# Altium PCB ECU.PcbDoc
Units mil, origin at the board's own origin, x right, y up, seen from the top; angles counter-clockwise.
Board outline 7000 x 5000 mil, 2 copper layers (Top Layer, Bottom Layer); 79 components, 78 nets, 296 pads, 2 vias.
Unrouted connection lines stored in the file: 142.
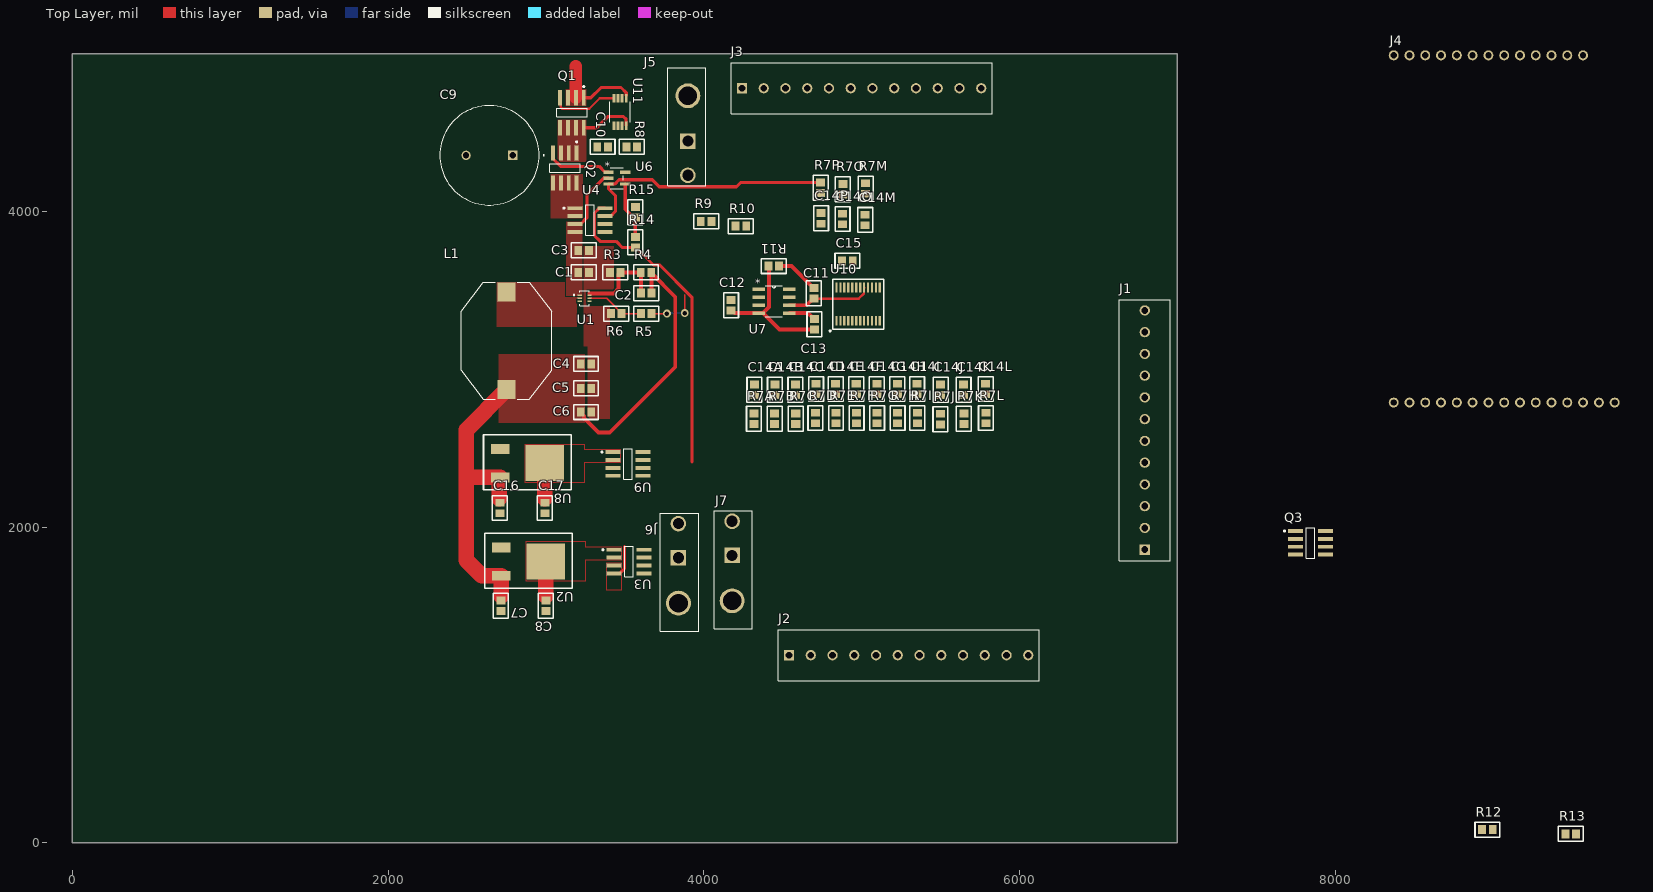
[diagram p0: Top Layer view]
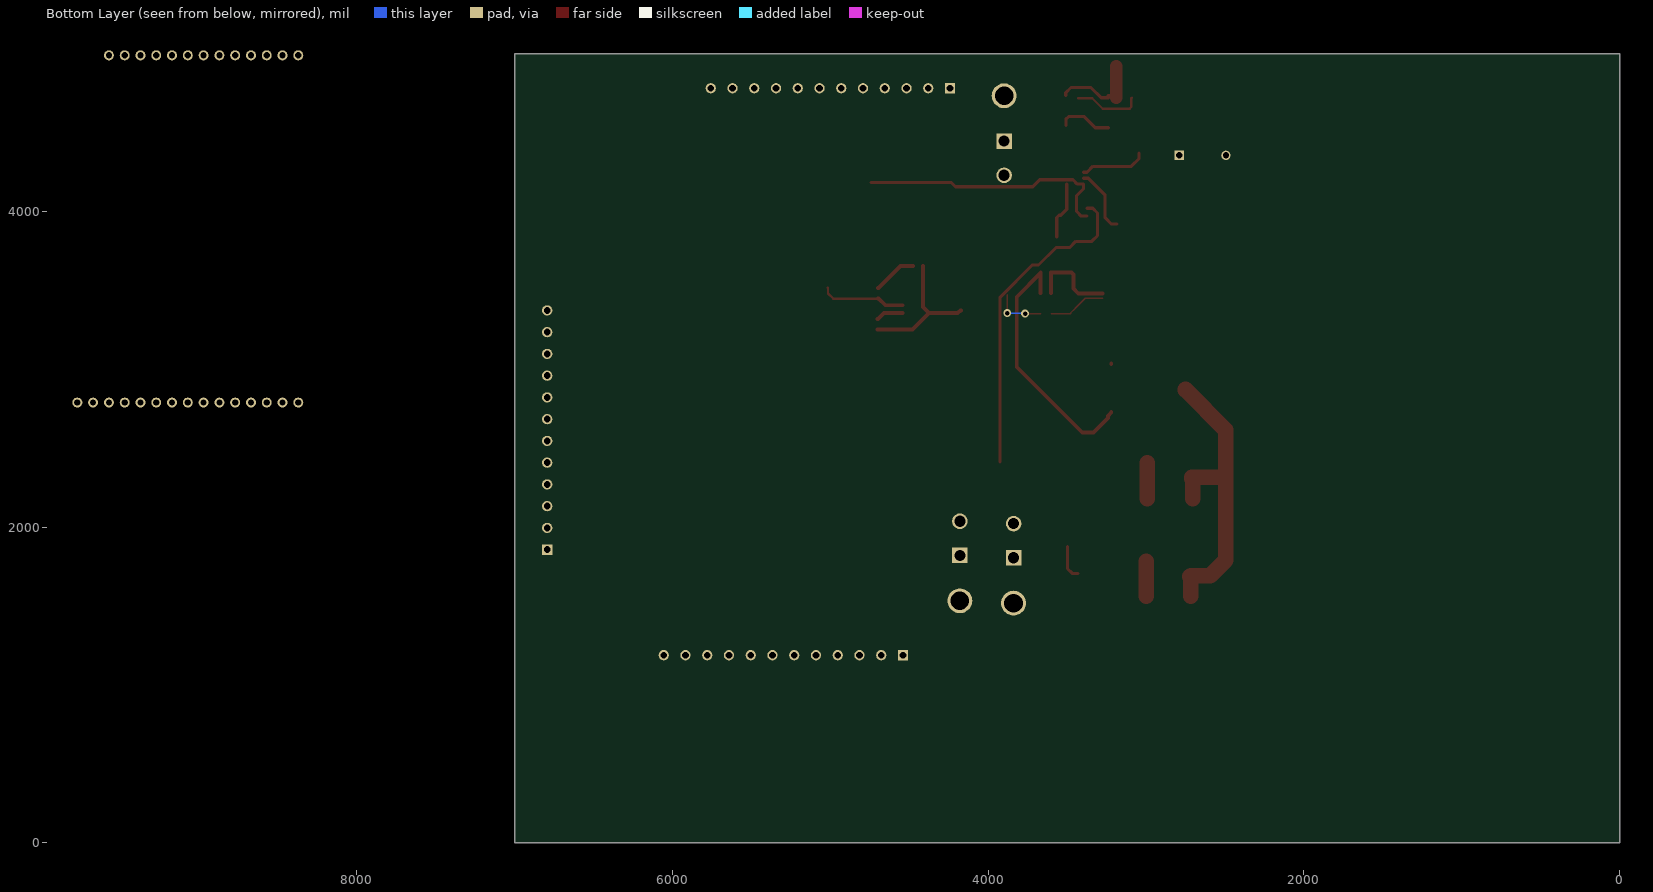
[diagram p1: Bottom Layer view, seen from below]

## Layer stack, top to bottom
Top Solder: solder mask 0.4, Solder Resist, Dk 3.5
Top Layer: signal copper 1.4
Dielectric 1: dielectric 12.6, FR-4, Dk 4.8
Bottom Layer: signal copper 1.4
Bottom Solder: solder mask 0.4, Solder Resist, Dk 3.5

## Board outline
0,0 7000,0 7000,5000 0,5000

## Design rules (kind name [scope] priority, off if disabled: settings)
BoardOutlineClearance BoardOutlineClearance_JLC [All] p1: gap=7.87 ignorepadtopadclearanceinfootprint=FALSE
Clearance Clearance_JLC [All] p1: gap=10 ignorepadtopadclearanceinfootprint=FALSE except(0: SMDPad-Hole Fill-Hole Poly-Hole Region-Hole Text-Hole; 5: Arc-Arc Arc-Track Track-Track SMDPad-SMDPad Fill-Fill Fill-Poly Fill-Region Poly-Region Region-Region; 5.91: SMDPad-Text THPad-Text Via-Text; 7.87: Arc-SMDPad Track-SMDPad; 12.99: Arc-THPad Track-THPad; 21.26: THPad-THPad THPad-Via THPad-Hole Via-Hole)
Clearance [All] p2: gap=10 ignorepadtopadclearanceinfootprint=FALSE except(0: Arc-Hole Track-Hole SMDPad-Hole THPad-Hole Via-Hole Fill-Hole Poly-Hole Region-Hole Text-Hole)
HoleSize ViaSize_JLC [IsVia] p1: absolutevalues=TRUE maxlimit=248.03 minlimit=11.81 maxpercent=80.000 minpercent=20.000
HoleSize PadSize_JLC [IsPad] p2: absolutevalues=TRUE maxlimit=250 minlimit=27.56 maxpercent=80.000 minpercent=20.000
HoleSize HoleSize_JLC [All] p3: absolutevalues=TRUE maxlimit=248.03 minlimit=9.84 maxpercent=80.000 minpercent=20.000
HoleSize [All] p4: absolutevalues=TRUE maxlimit=100 minlimit=1 maxpercent=80.000 minpercent=20.000
HoleToHoleClearance HoleToHoleClearance_JLC [All] p1: gap=19.68 allowstackedmicrovias=TRUE
HoleToHoleClearance [All] p2: gap=10 allowstackedmicrovias=TRUE
MinimumAnnularRing MinViaDiam_JLC [IsVia] p1: minimumring=9.06
MinimumAnnularRing PTHDiam_JLC [All] p2: minimumring=5.91
MinimumSolderMaskSliver [All] p1: minsoldermaskwidth=7.87
PlaneClearance PlaneClearance_inPolygon [InPolygon] p1: clearance=39.37
PlaneClearance PlaneClearance_JLC [All] p2: clearance=39.37
PlaneClearance [All] p3: clearance=20
PolygonConnect PolygonConnect_Via [All] p1: connectstyle=Direct reliefconductorwidth=15.75 reliefentries=4 polygonreliefangle="90 Angle" airgapwidth=10
PolygonConnect [All] p2: connectstyle=Relief reliefconductorwidth=10 reliefentries=4 polygonreliefangle="90 Angle" airgapwidth=10
RoutingVias RoutingVias_JLC [All] p1: holewidth=28 width=50 viastyle="Through Hole" minholewidth=0.79 minwidth=17.72 maxholewidth=28 maxwidth=50
RoutingVias [All] p2: holewidth=28 width=50 viastyle="Through Hole" minholewidth=28 minwidth=50 maxholewidth=28 maxwidth=50
SilkToSolderMaskClearance PadToSilk_JLC [IsPad] p1: minsilkscreentomaskgap=5.91 clearancetoexposedcopper=TRUE
SolderMaskExpansion SolderMaskExpansion_JLC [All] p1: expansion=1.97 istentingtop=FALSE
SolderMaskExpansion [All] p2: expansion=4 istentingtop=FALSE
Width Width_JLC_GND [InNet('GND')] p1: maxlimit=216.54 minlimit=5 preferedwidth=10 minimp=50.000000 maximp=50.000000 favimp=50.000000
Width Width_JLC_HighPower [InNetClass('HighPower')] p2: maxlimit=216.54 minlimit=39.37 preferedwidth=129.92 minimp=50.000000 maximp=50.000000 favimp=50.000000
Width Width_JLC_LowPower [InNetClass('LowPower')] p3: maxlimit=78.74 minlimit=10 preferedwidth=59.06 minimp=50.000000 maximp=50.000000 favimp=50.000000
Width Width_JLC_Signal [InNetClass('Signal')] p4: maxlimit=39.37 minlimit=5 preferedwidth=10 minimp=50.000000 maximp=50.000000 favimp=50.000000
Width Width_JLC [All] p5: maxlimit=100 minlimit=5 preferedwidth=10 minimp=50.000000 maximp=50.000000 favimp=50.000000
Width [All] p6: maxlimit=10 minlimit=10 preferedwidth=10
25 further rules are at their usual default settings.

## Classes and differential pairs
component class ECU_Power: C1 C2 C3 C4 C5 C6 C7 C8 C9 C10 C16 C17 L1 Q1 Q2 R3 R4 R5 R6 R8 R14 R15 U1 U2 U3 U4 U6 U8 U9 U11
component class ECU_Interface: J1 J2 J3 J4 J5 J6 J7 Q3
component class ECU_ADC: C11 C12 C13 C14A C14B C14C C14D C14E C14F C14G C14H C14I C14J C14K C14L C14M C14O C14P C15 R7A R7B R7C R7D R7E R7F R7G R7H R7I R7J R7K R7L R7M R7O R7P R9 R10 R11 R12 R13 U7 U10

## Components (designator, comment, footprint, x,y, rotation, side; value= is the part's Value field where it differs from the comment)
C1 "10uF 4mO" 0805 3235,3615 r180 top
C2 "33 pF" 0805 3640,3480 r0 top
C3 "100nF 20mO" 0805 3235,3755 r180 top
C4 "22uF 750uO" 0805 3250,3035 r180 top
C5 "22uF 750uO" 0805 3250,2880 r180 top
C6 "100nF 30mO" 0805 3250,2730 r180 top
C7 "10 uF" 0805 2716.83,1506.04 r90 top
C8 "10 uF" 0805 3001.83,1506.04 r90 top
C9 "470uF electrolytic" CAPPRD750W80D1600H2700 2642.36,4355 r180 top
C10 "Cap_0805" 0805 3355,4410 r180 top
C11 "47uF" 0805 4700,3485 r90 top
C12 "10uF" 0805 4175,3410 r90 top
C13 "1uF" 0805 4700,3280 r270 top
C14A "0.1 uF" 0805 4320,2865 r270 top
C14B "0.1 uF" 0805 4450,2865 r270 top
C14C "0.1 uF" 0805 4580,2865 r270 top
C14D "0.1 uF" 0805 4710,2870 r270 top
C14E "0.1 uF" 0805 4835,2870 r270 top
C14F "0.1 uF" 0805 4965,2870 r270 top
C14G "0.1 uF" 0805 5095,2870 r270 top
C14H "0.1 uF" 0805 5225,2870 r270 top
C14I "0.1 uF" 0805 5350,2870 r270 top
C14J "0.1 uF" 0805 5500,2865 r270 top
C14K "0.1 uF" 0805 5645,2865 r270 top
C14L "0.1 uF" 0805 5785,2870 r270 top
C14M "0.1 uF" 0805 5025,3950 r90 top
C14O "0.1 uF" 0805 4881.65,3955.98 r90 top
C14P "0.1 uF" 0805 4745,3960 r90 top
C15 "0.1 uF" 0805 4915,3685 r0 top
C16 "10 uF" 0805 2710,2125 r90 top
C17 "10 uF" 0805 2995,2125 r90 top
J1 "1-284391-2" TE_1-284391-2 6795,2614.49 r90 top
J2 "1-284391-2" TE_1-284391-2 5298.61,1187.84 r0 top
J3 "1-284391-2" TE_1-284391-2 5000.51,4780 r0 top
J4 "TopBoardConnector" TopBoardConnector 9071.9,3888.51 r90 top
J5 "CONN HEADER R/A 2POS" "2 POS MOLEX" 3900,4732.4 r180 top
J6 "CONN HEADER R/A 2POS" "2 POS MOLEX" 3840,1517.6 r0 top
J7 "CONN HEADER R/A 2POS" "2 POS MOLEX" 4180,1532.6 r0 top
L1 "SDR1806-2R2ML" IND_BOURNS_SDR1806 2750,3180 r270 top
Q1 "n-mos" D0008A-IPC_A 3165,4625.02 r270 top
Q2 "P-Mos Rds 5mOhm @ 10V" D0008A-IPC_A 3120,4275 r270 top
Q3 "n-mos" D0008A-IPC_A 7845,1900 r0 top
R3 "30k" 0805 3435,3615 r180 top
R4 "270k" 0805 3630,3615 r180 top
R5 "100k" 0805 3640,3350 r0 top
R6 "11.8k" 0805 3450,3350 r0 top
R7A "330 Ohm" 0805 4320,2690 r90 top
R7B "330 Ohm" 0805 4451.65,2690.98 r90 top
R7C "330 Ohm" 0805 4585,2690 r90 top
R7D "330 Ohm" 0805 4710,2695 r90 top
R7E "330 Ohm" 0805 4840,2695 r90 top
R7F "330 Ohm" 0805 4970,2695 r90 top
R7G "330 Ohm" 0805 5100,2695 r90 top
R7H "330 Ohm" 0805 5230,2695 r90 top
R7I "330 Ohm" 0805 5355,2695 r90 top
R7J "330 Ohm" 0805 5501.65,2687.91 r90 top
R7K "330 Ohm" 0805 5650,2690 r90 top
R7L "330 Ohm" 0805 5790,2695 r90 top
R7M "330 Ohm" 0805 5025,4140 r270 top
R7O "330 Ohm" 0805 4880,4135 r270 top
R7P "330 Ohm" 0805 4740,4145 r270 top
R8 "Res_0805" 0805 3540,4410 r180 top
R9 "1.2k Ohm" 0805 4020,3935 r0 top
R10 "4.7k Ohm" 0805 4240,3905 r0 top
R11 "1 Ohm" 0805 4440,3655 r180 top
R12 "1.24k Ohm" 0805 8970,80.59 r0 top
R13 "1.24k Ohm" 0805 9497.91,53.94 r0 top
R14 "4.7k" 0805 3565,3800 r270 top
R15 "2.2k" 0805 3565,3990 r270 top
U1 "TPS564247DRLR" SOT5x3-6_DRL_TEX 3245,3450 r0 top
U2 "Lin Reg 5V Out" NCP1117IDT50T4G 2826.83,1781.04 r270 top
U3 "TMCS1108A4BQDR" D0008A-IPC_A 3526.83,1781.04 r0 top
U4 "TMCS1108A4BQDR" D0008A-IPC_A 3280,3945 r0 top
U6 "OPAMP" SOT-23-5_MC_MCH-M 3450,4210 r0 top
U7 "REF5050MDREP" D8 4445,3430 r0 top
U8 "Lin Reg 5V Out" NCP1117IDT50T4G 2820,2405 r270 top
U9 "TMCS1108A4BQDR" D0008A-IPC_A 3520,2400 r0 top
U10 "ADC" QSOP24 4985,3405 r90 top
U11 "LTC4357IMS8TRPBF" MSOP-8_MS 3470,4630 r270 top

## Footprints (in the part's own frame and the unit in brackets; to place one, negate y for a bottom-side part, rotate by r counter-clockwise, add the part's x,y. Pads: shape width x height; smd on the part's side, far side on the other; paste and mask are expansions set on the pad)
"2 POS MOLEX" [mm] "1724480002"
  rect 2.5x2.5 hole 1.8 mask+0.06: 1(0,7.3)
  round 2.5 hole 1.8 mask+0.06: 2(0,12.8)
  round 4 hole 3 unplated mask+0.06: MNT(0,0)
  silkscreen extent -2.9,-4.5 3.25,14.5, body extent -2.7,-6.57 3.1,13.37, height 11.4
0805 [mm]
  rect 1.25x1.45 smd mask+0.06: 1(-0.963,0.042) 2(0.737,0.042)
  silkscreen extent -2.11,-1.16 1.89,1.24, body extent -1.19,-0.66 0.96,0.74, height 1.25
CAPPRD750W80D1600H2700 [mm]
  rect 1.5x1.5 hole 1: 1(-3.75,0)
  round 1.5 hole 1: 2(3.75,0)
  silkscreen extent -8.85,-8 8,8
D8 [mil]
  rect 78x22 smd: 1(-97,75) 2(-97,25) 3(-97,-25) 4(-97,-75) 5(97,-75) 6(97,-25) 7(97,25) 8(97,75)
  silkscreen extent -54,-98 54,98, body extent 0,0 10,10, height 10
D0008A-IPC_A [mil]
  rect 97.21x24.49 smd paste+0 mask+0: 1(-95.02,75) 2(-95.02,25) 3(-95.02,-25) 4(-95.02,-75) 5(95.02,-75) 6(95.02,-25) 7(95.02,25) 8(95.02,75)
  silkscreen extent -170,-97 27,97, body extent 0,0 10,10, height 10
IND_BOURNS_SDR1806 [mil]
  rect 118x114 smd paste+0 mask+0: 1(-309,0) 2(309,0)
  silkscreen extent -371,-287 371,287, body extent -378,-281 378,281, height 284
MSOP-8_MS [mil]
  rect 55x17 smd: 1(-87,38.39) 2(-87,12.8) 3(-87,-12.8) 4(-87,-38.39) 5(87,-38.39) 6(87,-12.8) 7(87,12.8) 8(87,38.39)
  silkscreen extent -66,-66 66,66
NCP1117IDT50T4G [mm]
  rect 1.6x3 smd: GND(-2.285,-2.79) IN(2.285,-2.79)
  rect 5.8x6.2 smd: OUT(0,4.39)
  silkscreen extent -4.57,-5.46 4.32,8.64
QSOP24 [mm]
  rect 1.6x0.36 smd mask+0.06: 1(-2.495,3.651) 2(-2.495,3.016) 3(-2.495,2.381) 4(-2.495,1.746) 5(-2.495,1.111) 6(-2.495,0.476) 7(-2.495,-0.159) 8(-2.495,-0.794) 9(-2.495,-1.429) 10(-2.495,-2.064) 11(-2.495,-2.699) 12(-2.495,-3.334) 13(2.825,-3.334) 14(2.825,-2.699) 15(2.825,-2.064) 16(2.825,-1.429) 17(2.825,-0.794) 18(2.825,-0.159) 19(2.825,0.476) 20(2.825,1.111) 21(2.825,1.746) 22(2.825,2.381) 23(2.825,3.016) 24(2.825,3.651)
  silkscreen extent -4.26,-3.94 4.17,4.78
SOT5x3-6_DRL_TEX [mil]
  rect 28x9 smd paste+0 mask+0: 1(-31.5,19.69) 2(-31.5,0) 3(-31.5,-19.69) 4(31.5,-19.69) 5(31.5,0) 6(31.5,19.69)
  silkscreen extent -71,-48 30,48, body extent -34,-44 34,44, height 24
SOT-23-5_MC_MCH-M [mil]
  rect 64x20 smd paste+0 mask+0: 1(-53,37.4) 2(-53,0) 3(-53,-37.4) 4(53,-37.4) 5(53,37.4)
  silkscreen extent -40,-66 40,66, body extent -63,-61 63,61, height 57
TE_1-284391-2 [mm]
  rect 1.65x1.65 hole 1.1: 1(-19.25,0)
  round 1.65 hole 1.1: 2(-15.75,0) 3(-12.25,0) 4(-8.75,0) 5(-5.25,0) 6(-1.75,0) 7(1.75,0) 8(5.25,0) 9(8.75,0) 10(12.25,0) 11(15.75,0) 12(19.25,0)
  silkscreen extent -21,-4.1 21,4.1
TopBoardConnector [mm]
  round 1.6 hole 1: 0-ADC_SS(27.94,12.7) 1-ADC_MISO(27.94,5.08) 2(-27.94,7.62) 3(-27.94,5.08) 4(-27.94,2.54) 5(-27.94,0) 5V(27.94,17.78) 7-UART-RX(-27.94,-2.54) 8-UART-TX(-27.94,-5.08) 10(-27.94,-7.62) 11(-27.94,-10.16) 12(-27.94,-12.7) 13(27.94,-5.08) 14(27.94,-2.54) 15(27.94,0) 16(27.94,2.54) 17(-27.94,15.24) 18(-27.94,12.7) 19(-27.94,10.16) 23-INJSW(-27.94,17.78) 24(-27.94,-15.24) 25(-27.94,-17.78) 26-ADC_MOSI(27.94,7.62) 27-ADC_CLK(27.94,10.16) 33(27.94,-7.62) 36(27.94,-10.16) 37(27.94,-12.7) GND(27.94,15.24)

## Part data
C1 C3 C4 C5 C6 C7 C8 C12 C14A C14B C14C C14D C14E C14F C14G C14H C14I C14J C14K C14L C14M C14O C14P C15 C16 C17: library part Cap_0805, "Cap 0805"
C2: library part Cap_0805, "Cap 0805 - 33 pF, 1mOhm"
C9: library part CAPPRD750W80D1600H2700, "470 µF 100 V Aluminum Electrolytic Capacitors Radial, Can 282mOhm @ 120Hz 2000 Hrs @ 85°C"
C10: "Cap 0805"
C11: library part Cap_0805, "Samsung Microelectronics CL21A476MQYNNNE"
C13: library part Cap_0805, "1uF Cap"
J1 J2 J3: "Conn Eurostyle Block F 12 POS 3.5mm Solder ST Thru-Hole 12A/Contact Box", Package=None, Arrow_Electronics-Purchase-URL=https://snapeda.com/shop?store=Arrow+Electronics&id=2875340, Availability=Good, DigiKey-Purchase-URL=https://snapeda.com/shop?store=DigiKey&id=2875340, MF="TE Connectivity", Mouser-Purchase-URL=https://snapeda.com/shop?store=Mouser&id=2875340, MP=1-284391-2, Price=None, SnapEDA_Link=https://www.snapeda.com/parts/1-284391-2/TE%20Connectivity%20AMP%20Connectors/view-part/2875340/?ref=snap
J4: "Connection to the bottom board"
J5 J6 J7: library part 1724480002, Color=Black, Manufacturer=Molex, Supplier Part Number 1=WM16206-ND, Category="Headers and Wire Housings", ComponentLink1Description=https://www.molex.com/pdm_docs/sd/1724480002_sd.pdf?src-supplier=Digi-Key, ComponentLink1URL=https://www.molex.com/pdm_docs/sd/1724480002_sd.pdf?src-supplier=Digi-Key, Connector Type="Male Pin", Contact Plating=Tin, Fastening Type=Ramp, Glow Wire Compliant=Compliant, Manufacturer Part Number=1724480002, Mount="Through Hole", Number of Circuits=2, Number of Pins=2, Number of Positions=2, Number of Rows=2, Orientation="Right Angle", Packaging=Tray, Pricing 1="1=0.55000, 10=0.46000, 100=0.35780, 1000=0.28116, 5000=0.24708, 10000=0.23004 (USD)", RoHS=No, Row Spacing=0.165inch, Stock 1=6210, Supplier 1=Digi-Key, Termination=Solder
L1: "No Description Available", Mfr_Name="Bourns Electronics", Copyright="Copyright (C) 2022 Ultra Librarian. All rights reserved.", Manufacturer_Part_Number=SDR1806-2R2ML, RefDes=RefDes, Type=DEV
Q1 Q3: library part DMN3007LSSQ-13, "MOSFET MOSFETBVDSS: 25V-30V"
Q2: library part UPA2735GR-E1-AT, "P-Channel 30 V 16A (Ta) 2.5W (Ta) Surface Mount 8-SOP", Mfr_Name="Renesas Electronics", Copyright="Copyright (C) 2022 Ultra Librarian. All rights reserved.", Manufacturer_Part_Number=UPA2735GR-E1-AT, RefDes=RefDes, Type=DEV
R3: library part Res_0805, "Res 0805 - 30kOhm"
R4: library part Res_0805, "Res 0805 - 270kOhm"
R5 R6 R7A R7B R7C R7D R7E R7F R7G R7H R7I R7J R7K R7L R7M R7O R7P R9 R10 R11 R12 R13 R14 R15: library part Res_0805, "Res 0805"
R8: "Res 0805"
U1 U3 U4 U7 U9: "No Description Available", Mfr_Name="Texas Instruments", Copyright="Copyright (C) 2022 Ultra Librarian. All rights reserved.", RefDes=RefDes, Type=DEV
  U1: Manufacturer_Part_Number=TPS564247DRLR
  U3 U4 U9: Manufacturer_Part_Number=TMCS1108A4BQDR
  U7: Manufacturer_Part_Number=REF5050MDREP
U2 U8: library part NCP1117IDT50T4G, "Linear Voltage Regulator IC Positive Fixed 1 Output 1A DPAK"
U6: library part MCP6486T-EOT, "Operational Amplifiers - Op Amps Single, 10MHz Op Amp, E Temp", Mfr_Name=Microchip, Copyright="Copyright (C) 2022 Ultra Librarian. All rights reserved.", Manufacturer_Part_Number=MCP6486T-EOT, RefDes=RefDes, Type=DEV
U10: library part MAX11624EEG+-ND, "GLOVE, POLYAMIDE, L/FREE, PU, SIZE 6 - More Details"
U11: "OR Controller N+1 ORing Controller N-Channel N:1 8-MSOP", Package="MSOP-8 Analog Devices", Availability=Unavailable, MF="Analog Devices", MP=LTC4357IMS8#TRPBF, Price=None, SnapEDA_Link=https://www.snapeda.com/parts/LTC4357IMS8%23TRPBF/Analog%20Devices/view-part/4335178/?ref=snap

## Via types
v1: diameter 50, hole 28, Top Layer to Bottom Layer, 2 vias

## Nets (pads, with @x,y where several pads share a name; then routed paths per layer and width w, separated by ;. In a path a pad name is that pad's centre, name@x,y a point inside that pad or via, vN(x,y) a via of type N, cw(c..) or ccw(c..) an arc to the next point about the centre after c; other vN are vias at no path point)
2: J2.3 J4.2
3: J2.4 J4.3
4: J2.5 J4.4
5: J2.6 J4.5
5V: C8.2 U2.OUT U3.1 U3.2 | length 220
  Top Layer w100: 2999.67,1561.04 U2.OUT
5VA: C17.2 U8.OUT U9.1 U9.2 | length 225
  Top Layer w100: 2992.83,2180 U8.OUT
5VREF: C11.1 U7.6 U10.17 | length 541
  Top Layer w15: C11.1 4982.43,3447.09 5015.83,3480.48 5015.83,3515.81 U10.17
  Top Layer w25: U7.6 4652.32,3405 4694.41,3447.09 C11.1
7_UART-RX: J2.7 J4.7-UART-RX
8_UART-TX: J2.8 J4.8-UART-TX
10: J2.9 J4.10
11: J2.10 J4.11
12: J2.11 J4.12
12VCurrSensor: R7P.1 U4.7 U6.3 | length 1655.4
  Top Layer w20: U4.7 3411.38,3970 3441.5,4000.12 3441.5,4098.5 3397,4143 U6.3 3435.72,4172.6 3463.6,4200.47 3674.65,4200.47 3718.86,4156.26 4207.66,4156.26 4234.31,4182.91 R7P.1
13: J3.3 J4.13
14: J3.2 J4.14
17: J1.12 J4.17
18: J2.1 J4.18
19: J2.2 J4.19
24: J2.12 J4.24
25: J3.1 J4.25
33: J3.4 J4.33
36: J3.5 J4.36
37: J3.6 J4.37
+5: C15.2 J4.5V J6.1 R13.2 R14.2 U3.3 U3.4 U4.8 U10.19 | length 2264
  Top Layer w20: U4.8 3338.66,4020 3308.54,3989.88 3308.54,3846.46 3345,3810 3445,3810 3484.02,3770.98 R14.2 3570.59,3770.98 3681.81,3659.76 3721.14,3659.76 3925,3455.9 3925,2411.02 ; U3.4 3468.17,1706.04 3498.29,1736.16 3498.29,1875.69
+5A: J7.1 U3.8 U9.3 U9.4 U9.8
+6: C2.2 C4.2 C5.2 C6.2 C7.2 C16.2 L1.2 R4.1 U2.IN U8.IN | length 3558.9
  Top Layer w25: C6.2 3220.98,2724.41 3242.93,2702.46 3242.93,2691.36 3334.3,2600 3405,2600 3820,3015 3820,3457.32 R4.1@3668.46,3608.86 ; C4.2 C4.2@3220.98,3037.28 ; R4.1 3667.91,3609.41 R4.1@3668.46,3608.86 ; C2.2 3668.46,3482.2 R4.1@3668.46,3608.86
  Top Layer w100: 2705,2180 2705,2300.43 2710.16,2305.59 U8.IN 2504.96,2315.04 2495,2325 ; 2716.83,1561.04 2716.83,1681.24 U2.IN@2721.83,1686.24 ; U2.IN 2593.92,1691.08 2495,1790 2495,2325 ; L1.2 2750,2869 2495,2614 2495,2325
+12: C1.2 C3.2 C12.2 R5.2 R10.2 U1.1 U4.3 U4.4 U6.2 U7.2 | length 746.6
  Top Layer w10: R5.2 v1(3766.65,3351.65) ; v1(3880,3355) 3880,3472.62
  Top Layer w20: U4.3 3221.34,3920 3260,3958.66 3260,4102.88 3367.12,4210 U6.2
  Bottom Layer w10: v1(3766.65,3351.65) 3768.33,3353.33 3878.33,3353.33 v1(3880,3355)
+12RAW: J5.1 Q1.1 Q1.2 Q1.3 U11.1 | length 577.1
  Top Layer w20: Q1.2@3190,4734.5 Q1.1@3240,4734.5 ; Q1.1 3285.05,4720.05 3350,4785 3476.07,4785 3509.17,4751.9 U11.1@3509.17,4734.5
  Top Layer w80: Q1.2 3190,4920
AGND: C12.1 C13.2 C14A.1 C14B.1 C14C.1 C14D.1 C14E.1 C14F.1 C14G.1 C14H.1 C14I.1 C14J.1 C14K.1 C14L.1 C14M.1 C14O.1 C14P.1 C15.1 R11.2 U1.4 U3.5 U4.5 U7.4 U9.5 U10.18 | length 892.6
  Top Layer w25: C12.1 4177.28,3372.09 4194.37,3355 U7.4 U7.4@4376.81,3355 ; R11.2@4415,3653.28 4415,3393.19 U7.4@4376.81,3355 ; C13.2 4480.83,3250.98 U7.4@4376.81,3355
EN: R5.1 R6.2 U1.5 | length 368.9
  Top Layer w10: U1.5 3385.1,3450 3449.57,3385.53 3449.57,3385.04 3479.02,3355.59 R6.2 R5.1
FAIN0: C14A.2 R7A.2 U10.1
FAIN1: C14B.2 R7B.2 U10.2
FAIN2: C14C.2 R7C.2 U10.3
FAIN3: C14D.2 R7D.2 U10.4
FAIN4: C14E.2 R7E.2 U10.5
FAIN5: C14F.2 R7F.2 U10.6
FAIN6: C14G.2 R7G.2 U10.7
FAIN7: C14H.2 R7H.2 U10.8
FAIN8: C14I.2 R7I.2 U10.9
FAIN9: C14J.2 R7J.2 U10.10
FAIN10: C14K.2 R7K.2 U10.11
FAIN11: C14L.2 R7L.2 U10.12
FAIN12: C14M.2 R7M.2 U10.13
FAIN13: C14O.2 R7O.2 U10.14
FAIN14: C14P.2 R7P.2 U10.15
FB: C2.1 R3.1 R4.2 U1.6 | length 566.3
  Top Layer w25: 3275,3480 3430,3480 3460.81,3510.81 3460.81,3601.24 R3.1 R4.2 3601.54,3612.8 3601.54,3482.2 C2.1
GATE: Q1.4 U11.4 | length 430.6
  Top Layer w15: Q1.4 3093.81,4716.23 3093.81,4661.19 3105,4650 3275,4650 3342,4717 U11.4
GND: C1.1 C3.1 C4.1 C5.1 C6.1 C7.1 C8.1 C9.2 C10.2 C16.1 C17.1 J4.GND J5.2 J6.2 J7.2 Q3.5 Q3.6 Q3.7 Q3.8 R3.2 R6.1 R9.1 R12.1 R15.1 U1.3 U2.GND U6.5 U8.GND U11.5
INJ: J1.11 Q3.1 Q3.2 Q3.3
INJSW: J4.23-INJSW Q3.4
NetC10_1: C10.1 R8.2 U11.7
NetC11_2: C11.2 R11.1 | length 278.1
  Top Layer w25: R11.1 4555.08,3653.35 4694.41,3514.02 C11.2
NetC13_1: C13.1 U7.5 | length 175
  Top Layer w25: U7.5 4660.63,3355 4697.72,3317.91 C13.1
NetJ1_1: J1.1 R7A.1
NetJ1_2: J1.2 R7B.1
NetJ1_3: J1.3 R7C.1
NetJ1_4: J1.4 R7D.1
NetJ1_5: J1.5 R7E.1
NetJ1_6: J1.6 R7F.1
NetJ1_7: J1.7 R7G.1
NetJ1_8: J1.8 R7H.1
NetJ1_9: J1.9 R7I.1
NetJ1_10: J1.10 R7J.1
NetJ4_0-ADC_SS: J4.0-ADC_SS U10.20
NetJ4_1-ADC_MISO: J4.1-ADC_MISO U10.23
NetJ4_15: J4.15 U10.16
NetJ4_16: J4.16 U10.24
NetJ4_26-ADC_MOSI: J4.26-ADC_MOSI U10.22
NetJ4_27-ADC_CLK: J4.27-ADC_CLK U10.21
NetQ2_4: Q2.4 U6.1 | length 424.1
  Top Layer w20: Q2.4 3045,4333.66 3093.66,4285 3337.4,4285 3375,4247.4 U6.1
NetR7K_1: R7K.1 R12.2 R13.1
NetR7L_1: R7L.1 R9.2 R10.1
NetR7M_1: R7M.1 U9.7
NetR7O_1: R7O.1 U3.7
NetR14_1: R14.1 R15.2 U6.4 | length 367.8
  Top Layer w20: U6.4 3503,4013.14 3540.55,3975.59 3552.05,3975.59 R15.2 R14.1
OUTCURRLIMITER: Q2.5 Q2.6 Q2.7 Q2.8 U4.1 U4.2
OUTSMARTDIODE: C9.1 Q1.5 Q1.6 Q1.7 Q1.8 Q2.1 Q2.2 Q2.3 R8.1 U11.8 | length 344.6
  Top Layer w18: U11.8 3508.39,4583.39
  Top Layer w20: Q1.8 3321.98,4530 3391.98,4600 3491.77,4600 3508.39,4583.39
SW: L1.1 U1.2
pads on no net: J3.7 J3.8 J3.9 J3.10 J3.11 J3.12 J5.MNT J6.MNT J7.MNT U3.6 U4.6 U7.1 U7.3 U7.7 U7.8 U9.6 U11.2 U11.3 U11.6

## Polygon pours and split planes (outlines as drawn)
5V on Top Layer "5V_L01_P008" (solid, pour order 8): 2871.83,1661.04 3251.83,1661.04 3251.83,1791.04 3481.83,1791.04 3481.83,1871.04 3251.83,1871.04 3251.83,1906.04 2871.83,1906.04
+5 on Top Layer "+5_L01_P010" (solid, pour order 10): 3481.83,1601.04 3481.83,1771.04 3381.83,1771.04 3381.83,1601.04
+12 on Top Layer "+12_L01_P003" (solid, pour order 3): 3130,3935 3230,3935 3230,3465 3130,3465
SW on Top Layer "SW_L01_P014" (solid, pour order 14): 3230,3455 3120,3455 3120,3550 2690,3550 2690,3270 3195,3270 3195,3445 3230,3445
+6 on Top Layer "+6_L01_P015" (solid, pour order 15): 2700,3095 2700,2660 3245,2660 3245,3095
GND on Top Layer "GND_L01_P017" (solid, pour order 17): 3430,3780 3430,3505 3255,3505 3255,3400 3405,3400 3405,2685 3265,2685 3265,3145 3240,3145 3240,3780
OUTCURRLIMITER on Top Layer "OUTCURRLIMITER_L01_P002" (solid, pour order 2): 3235,4235 3030,4235 3030,3955 3235,3955
5VA on Top Layer "5VA_L01_P009" (solid, pour order 9): 2865,2285 3245,2285 3245,2410 3475,2410 3475,2490 3245,2490 3245,2520 2865,2520
OUTSMARTDIODE on Top Layer "OUTSMARTDIODE_L01_P001" (solid, pour order 1): 3255,4580 3255,4315 3075,4315 3075,4580
+12RAW on Top Layer "+12RAW_L01_P000" (solid, pour order 0): 3255,4772.5 3125,4772.5 3125,4670 3255,4670

## Text inside footprints (layer, text, board x,y; h text height)
U6: Top Overlay "*" at 3374.5,4262.4 h50; Mechanical 13 "*" at 3412,4224.4 h50
U7: Top Overlay "*" at 4325.5,3522 h50; Mechanical 13 "*" at 4325.5,3522 h50